# Altium PCB m2t7.PcbDoc (part 3 of 3)
Units mil, origin at the board's own origin, x right, y up, seen from the top; angles counter-clockwise.
Board outline 3925 x 3925 mil, 2 copper layers (TopLayer, BottomLayer); 79 components, 92 nets, 975 pads, 13 vias.
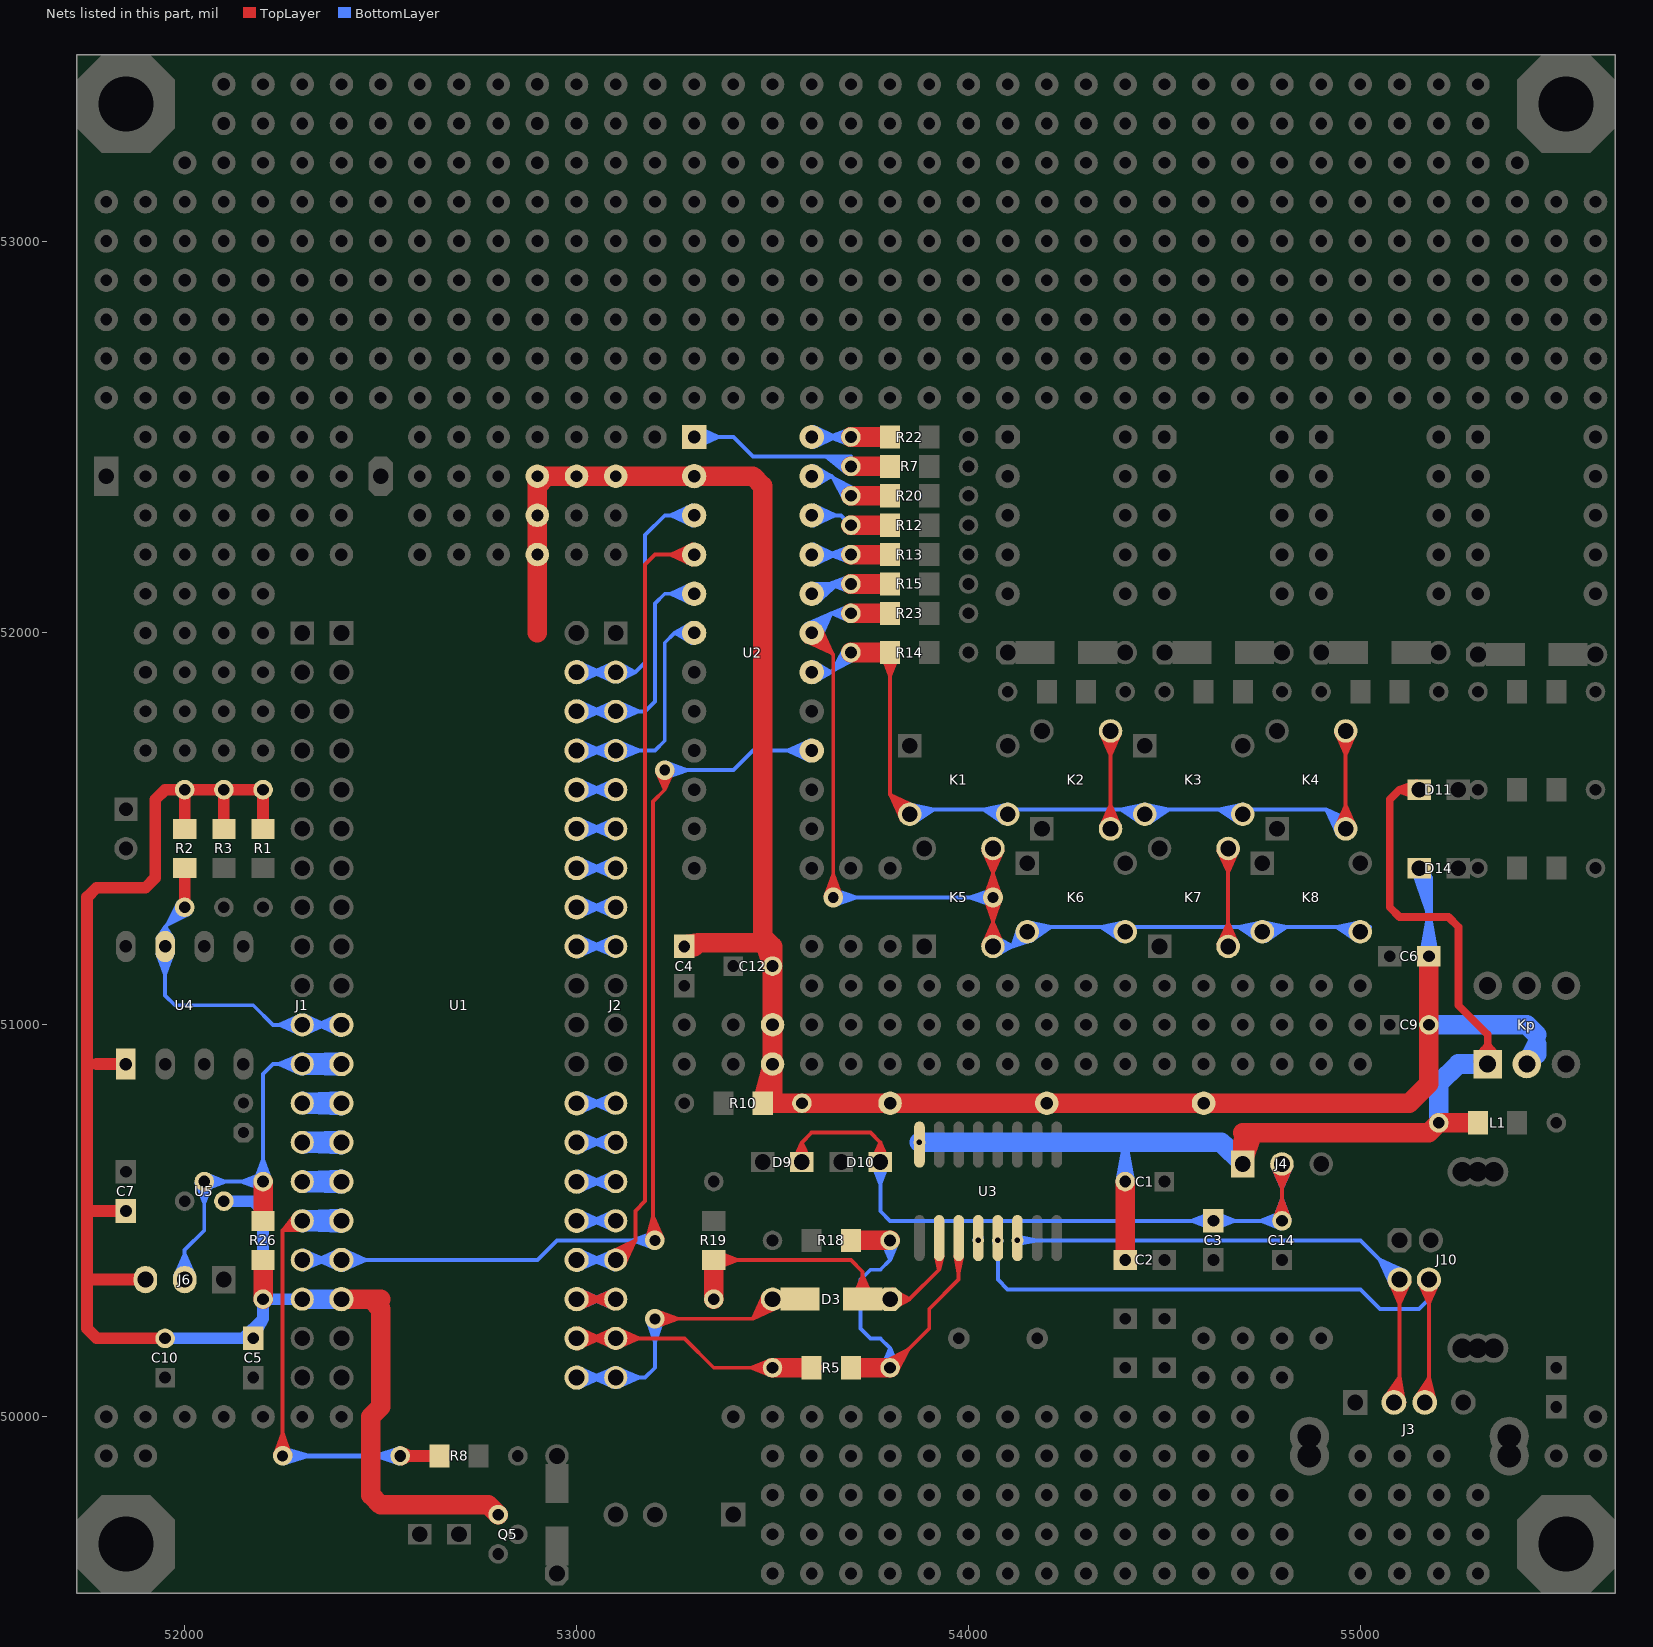
[diagram p3: the nets of this part, all layers, seen from the top]

## Via types
v1: diameter 50, hole 28, TopLayer to BottomLayer, 8 vias
v2: diameter 30, hole 14, TopLayer to BottomLayer, 5 vias

## Nets (pads, with @x,y where several pads share a name; then routed paths per layer and width w, separated by ;. In a path a pad name is that pad's centre, name@x,y a point inside that pad or via, vN(x,y) a via of type N, cw(c..) or ccw(c..) an arc to the next point about the centre after c; other vN are vias at no path point) (continued)
P12: J1.11 R2.2 R2.4 U1.11 U4.7 | length 2380.4
  TopLayer w30: R2.2@52000,51300 R2.4@52000,51400
  BottomLayer w10: U4.7@51930.33,51181.36 51950,51130 ; U4.7@51930.83,51220.71 51950,51250 ; U4.7@51940.04,51184.09 51950,51130 ; U4.7@51940.1,51216.43 51950,51250 ; U4.7@51950,51185 51950,51130 ; U4.7@51950,51215 51950,51250 ; U4.7@51959.9,51216.43 51950,51250 ; U4.7@51959.96,51184.09 51950,51130 ; U4.7@51969.17,51220.71 51950,51250 ; U4.7@51969.67,51181.36 51950,51130 ; R2.2@51983.86,51311.81 51953.79,51253.79 ; R2.2@51992.41,51306.51 51953.79,51253.79 ; R2.2@52000,51300 51950,51250 ; R2.2@52006.51,51292.41 51953.79,51253.79 ; R2.2@52011.81,51283.86 51953.79,51253.79 ; J1.11@52294.95,50976 52240.47,51000 ; J1.11@52294.95,51024 52240.47,51000 ; J1.11@52298.23,50985.58 52240.47,51000 ; J1.11@52298.23,51014.42 52240.47,51000 ; J1.11@52301.77,50985.58 52359.53,51000 ; J1.11@52301.77,51014.42 52359.53,51000 ; J1.11@52305.05,50976 52359.53,51000 ; J1.11@52305.05,51024 52359.53,51000 ; U1.11@52394.46,50974.6 52339,51000 ; U1.11@52394.46,51025.4 52339,51000 ; U1.11@52397.9,50984.14 52339,51000 ; U1.11@52397.9,51015.86 52339,51000 ; U1.11@52399.7,50994.01 52339,51000 ; U1.11@52399.7,51005.99 52339,51000 ; U1.11@52400,51000 J1.11@52300,51000 52225,51000 52175,51050 51975,51050 51950,51075 U4.7@51950,51200 51950,51250
P13: J1.12 J6.2 R26.2 R26.4 U1.12 U5.2 | length 3386.7
  TopLayer w50: R26.4@52200,50500 R26.2@52200,50600
  BottomLayer w10: J6.2@51975.55,50360.21 52000,50415 ; J6.2@51985.12,50356.88 52000,50415 ; J6.2@52000,50350 52000,50425 52050,50475 U5.2@52050,50600 52105,50600 ; J6.2@52000,50355 52000,50415 ; J6.2@52014.88,50356.88 52000,50415 ; J6.2@52024.45,50360.21 52000,50415 ; U5.2@52030.33,50596.36 52050,50545 ; U5.2@52040.04,50599.09 52050,50545 ; U5.2@52050.91,50590.04 52105,50600 ; U5.2@52050.91,50609.96 52105,50600 ; U5.2@52053.64,50580.33 52105,50600 ; U5.2@52053.64,50600 R26.2@52200,50600 52200,50875 52225,50900 J1.12@52300,50900 ; U5.2@52053.64,50619.67 52105,50600 ; U5.2@52059.96,50599.09 52050,50545 ; U5.2@52069.67,50596.36 52050,50545 ; R26.2@52180.33,50603.64 52200,50655 ; R26.2@52190.04,50600.91 52200,50655 ; R26.2@52196.36,50580.33 52145,50600 ; R26.2@52196.36,50619.67 52145,50600 ; R26.2@52199.09,50590.04 52145,50600 ; R26.2@52199.09,50609.96 52145,50600 ; R26.2@52209.96,50600.91 52200,50655 ; R26.2@52219.67,50603.64 52200,50655 ; J1.12@52294.95,50876 52240.47,50900 ; J1.12@52294.95,50924 52240.47,50900 ; J1.12@52298.23,50885.58 52240.47,50900 ; J1.12@52298.23,50914.42 52240.47,50900
  BottomLayer w20: J1.12@52300,50900 U1.12@52400,50900 ; J1.12@52302.13,50880.59 52389.53,50900 J1.12@52302.13,50919.41 ; U1.12@52393.62,50879.99 J1.12@52310.04,50917.65 ; U1.12@52393.62,50920.01 J1.12@52310.04,50882.35 ; U1.12@52397.58,50879.14 52309,50900 U1.12@52397.58,50920.86 ; U1.12@52401.66,50879.07 J1.12@52310.04,50882.35 ; U1.12@52401.66,50920.93 J1.12@52310.04,50917.65 ; J1.12@52310.04,50882.35 U1.12@52400,50900 ; J1.12@52310.04,50917.65 U1.12@52400,50900
P14: J1.13 U1.13 | length 1011.1
  BottomLayer w20: J1.13@52300,50800 U1.13@52400,50800 ; J1.13@52302.13,50780.59 52389.53,50800 J1.13@52302.13,50819.41 ; U1.13@52393.62,50779.99 J1.13@52310.04,50817.65 ; U1.13@52393.62,50820.01 J1.13@52310.04,50782.35 ; U1.13@52397.58,50779.14 52309,50800 U1.13@52397.58,50820.86 ; U1.13@52401.66,50779.07 J1.13@52310.04,50782.35 ; U1.13@52401.66,50820.93 J1.13@52310.04,50817.65 ; J1.13@52310.04,50782.35 U1.13@52400,50800 ; J1.13@52310.04,50817.65 U1.13@52400,50800
P15: J1.14 U1.14 | length 1011.1
  BottomLayer w20: J1.14@52300,50700 U1.14@52400,50700 ; J1.14@52302.13,50680.59 52389.53,50700 J1.14@52302.13,50719.41 ; U1.14@52393.62,50679.99 J1.14@52310.04,50717.65 ; U1.14@52393.62,50720.01 J1.14@52310.04,50682.35 ; U1.14@52397.58,50679.14 52309,50700 U1.14@52397.58,50720.86 ; U1.14@52401.66,50679.07 J1.14@52310.04,50682.35 ; U1.14@52401.66,50720.93 J1.14@52310.04,50717.65 ; J1.14@52310.04,50682.35 U1.14@52400,50700 ; J1.14@52310.04,50717.65 U1.14@52400,50700
P16: J1.15 U1.15 | length 1011.1
  BottomLayer w20: J1.15@52300,50600 U1.15@52400,50600 ; J1.15@52302.13,50580.59 52389.53,50600 J1.15@52302.13,50619.41 ; U1.15@52393.62,50579.99 J1.15@52310.04,50617.65 ; U1.15@52393.62,50620.01 J1.15@52310.04,50582.35 ; U1.15@52397.58,50579.14 52309,50600 U1.15@52397.58,50620.86 ; U1.15@52401.66,50579.07 J1.15@52310.04,50582.35 ; U1.15@52401.66,50620.93 J1.15@52310.04,50617.65 ; J1.15@52310.04,50582.35 U1.15@52400,50600 ; J1.15@52310.04,50617.65 U1.15@52400,50600
P17: J1.16 R8.2 R8.4 U1.16 | length 3350
  TopLayer w10: v1@52230.29,49903.39 52250,49959 ; v1@52240.04,49900.85 52250,49959 ; v1(52250,49900) 52250,49959 ; 52250,49925 52250,50475 ; v1@52259.96,49900.85 52250,49959 ; v1@52269.71,49903.39 52250,49959 ; J1.16@52284.49,50519 52250,50475 ; J1.16@52291.87,50512.04 52250,50475 ; J1.16@52304.75,50486.27 52250,50475 ; J1.16@52305.89,50476.19 52250,50475 ; R8.2@52550,49900 52600,49900 ; R8.2@52551,49890.05 52600,49900 ; R8.2@52551,49909.95 52600,49900 ; R8.2@52554,49880.4 52600,49900 ; R8.2@52554,49919.6 52600,49900 ; 52250,50475 52275,50500 J1.16@52300,50500 52250,50475
  TopLayer w30: R8.2@52550,49900 R8.4@52650,49900
  BottomLayer w12: v1(52250,49900) R8.2@52550,49900 ; v1@52250.38,49893.01 52315,49900 ; v1@52250.38,49906.99 52315,49900 ; v1@52252.78,49881.2 52315,49900 ; v1@52252.78,49918.8 52315,49900 ; R8.2@52547.04,49881.23 52489,49900 ; R8.2@52547.04,49918.77 52489,49900 ; R8.2@52549.6,49893.01 52489,49900 ; R8.2@52549.6,49906.99 52489,49900
  BottomLayer w20: J1.16@52300,50500 U1.16@52400,50500 ; J1.16@52302.13,50480.59 52389.53,50500 J1.16@52302.13,50519.41 ; U1.16@52393.62,50479.99 J1.16@52310.04,50517.65 ; U1.16@52393.62,50520.01 J1.16@52310.04,50482.35 ; U1.16@52397.58,50479.14 52309,50500 U1.16@52397.58,50520.86 ; U1.16@52401.66,50479.07 J1.16@52310.04,50482.35 ; U1.16@52401.66,50520.93 J1.16@52310.04,50517.65 ; J1.16@52310.04,50482.35 U1.16@52400,50500 ; J1.16@52310.04,50517.65 U1.16@52400,50500
P20: J2.9 U1.32 | length 704.1
  BottomLayer w10: U1.32@53000,51200 J2.9@53100,51200 ; U1.32@53000.3,51194.01 53061,51200 ; U1.32@53000.3,51205.99 53061,51200 ; U1.32@53002.1,51184.14 53061,51200 ; U1.32@53002.1,51215.86 53061,51200 ; U1.32@53005.54,51174.6 53061,51200 ; U1.32@53005.54,51225.4 53061,51200 ; J2.9@53094.95,51176 53040.47,51200 ; J2.9@53094.95,51224 53040.47,51200 ; J2.9@53098.23,51185.58 53040.47,51200 ; J2.9@53098.23,51214.42 53040.47,51200
P21: J2.8 U1.33 | length 704.1
  BottomLayer w10: U1.33@53000,51300 J2.8@53100,51300 ; U1.33@53000.3,51294.01 53061,51300 ; U1.33@53000.3,51305.99 53061,51300 ; U1.33@53002.1,51284.14 53061,51300 ; U1.33@53002.1,51315.86 53061,51300 ; U1.33@53005.54,51274.6 53061,51300 ; U1.33@53005.54,51325.4 53061,51300 ; J2.8@53094.95,51276 53040.47,51300 ; J2.8@53094.95,51324 53040.47,51300 ; J2.8@53098.23,51285.58 53040.47,51300 ; J2.8@53098.23,51314.42 53040.47,51300
P22: J2.7 U1.34 | length 704.1
  BottomLayer w10: U1.34@53000,51400 J2.7@53100,51400 ; U1.34@53000.3,51394.01 53061,51400 ; U1.34@53000.3,51405.99 53061,51400 ; U1.34@53002.1,51384.14 53061,51400 ; U1.34@53002.1,51415.86 53061,51400 ; U1.34@53005.54,51374.6 53061,51400 ; U1.34@53005.54,51425.4 53061,51400 ; J2.7@53094.95,51376 53040.47,51400 ; J2.7@53094.95,51424 53040.47,51400 ; J2.7@53098.23,51385.58 53040.47,51400 ; J2.7@53098.23,51414.42 53040.47,51400
P23: J2.6 U1.35 | length 704.1
  BottomLayer w10: U1.35@53000,51500 J2.6@53100,51500 ; U1.35@53000.3,51494.01 53061,51500 ; U1.35@53000.3,51505.99 53061,51500 ; U1.35@53002.1,51484.14 53061,51500 ; U1.35@53002.1,51515.86 53061,51500 ; U1.35@53005.54,51474.6 53061,51500 ; U1.35@53005.54,51525.4 53061,51500 ; J2.6@53094.95,51476 53040.47,51500 ; J2.6@53094.95,51524 53040.47,51500 ; J2.6@53098.23,51485.58 53040.47,51500 ; J2.6@53098.23,51514.42 53040.47,51500
P24: J2.5 U1.36 | length 704.1
  BottomLayer w10: U1.36@53000,51600 J2.5@53100,51600 ; U1.36@53000.3,51594.01 53061,51600 ; U1.36@53000.3,51605.99 53061,51600 ; U1.36@53002.1,51584.14 53061,51600 ; U1.36@53002.1,51615.86 53061,51600 ; U1.36@53005.54,51574.6 53061,51600 ; U1.36@53005.54,51625.4 53061,51600 ; J2.5@53094.95,51576 53040.47,51600 ; J2.5@53094.95,51624 53040.47,51600 ; J2.5@53098.23,51585.58 53040.47,51600 ; J2.5@53098.23,51614.42 53040.47,51600
P25: J2.4 U1.37 U2.6 | length 1712.9
  BottomLayer w10: U1.37@53000,51700 J2.4@53100,51700 53200,51700 53225,51725 53225,51975 53250,52000 ; U1.37@53000.3,51694.01 53061,51700 ; U1.37@53000.3,51705.99 53061,51700 ; U1.37@53002.1,51684.14 53061,51700 ; U1.37@53002.1,51715.86 53061,51700 ; U1.37@53005.54,51674.6 53061,51700 ; U1.37@53005.54,51725.4 53061,51700 ; J2.4@53094.95,51676 53040.47,51700 ; J2.4@53094.95,51724 53040.47,51700 ; J2.4@53098.23,51685.58 53040.47,51700 ; J2.4@53098.23,51714.42 53040.47,51700 ; J2.4@53101.77,51685.58 53159.53,51700 ; J2.4@53101.77,51714.42 53159.53,51700 ; J2.4@53105.05,51676 53159.53,51700 ; J2.4@53105.05,51724 53159.53,51700 ; U2.6@53293.24,51974.89 53250,52000 ; U2.6@53293.24,52025.11 53250,52000 ; U2.6@53297.44,51984.21 53250,52000 ; U2.6@53297.44,52015.79 53250,52000 ; U2.6@53299.64,51994.01 53250,52000 ; U2.6@53299.64,52005.99 53250,52000 ; U2.6@53300,52000 53250,52000
P26: J2.3 U1.38 U2.5 | length 1778.9
  BottomLayer w10: U1.38@53000,51800 J2.3@53100,51800 53175,51800 53200,51825 53200,52075 53225,52100 U2.5@53300,52100 ; U1.38@53000.3,51794.01 53061,51800 ; U1.38@53000.3,51805.99 53061,51800 ; U1.38@53002.1,51784.14 53061,51800 ; U1.38@53002.1,51815.86 53061,51800 ; U1.38@53005.54,51774.6 53061,51800 ; U1.38@53005.54,51825.4 53061,51800 ; J2.3@53094.95,51776 53040.47,51800 ; J2.3@53094.95,51824 53040.47,51800 ; J2.3@53098.23,51785.58 53040.47,51800 ; J2.3@53098.23,51814.42 53040.47,51800 ; J2.3@53101.77,51785.58 53159.53,51800 ; J2.3@53101.77,51814.42 53159.53,51800 ; J2.3@53105.05,51776 53159.53,51800 ; J2.3@53105.05,51824 53159.53,51800 ; U2.5@53294.46,52074.6 53239,52100 ; U2.5@53294.46,52125.4 53239,52100 ; U2.5@53297.9,52084.14 53239,52100 ; U2.5@53297.9,52115.86 53239,52100 ; U2.5@53299.7,52094.01 53239,52100 ; U2.5@53299.7,52105.99 53239,52100
P27: J2.2 U1.39 U2.3 | length 1826.2
  BottomLayer w10: U1.39@53000,51900 J2.2@53100,51900 53150,51900 ; U1.39@53000.3,51894.01 53061,51900 ; U1.39@53000.3,51905.99 53061,51900 ; U1.39@53002.1,51884.14 53061,51900 ; U1.39@53002.1,51915.86 53061,51900 ; U1.39@53005.54,51874.6 53061,51900 ; U1.39@53005.54,51925.4 53061,51900 ; J2.2@53094.95,51876 53040.47,51900 ; J2.2@53094.95,51924 53040.47,51900 ; J2.2@53098.23,51885.58 53040.47,51900 ; J2.2@53098.23,51914.42 53040.47,51900 ; J2.2@53102.11,51885.63 53150,51900 ; J2.2@53102.11,51914.37 53150,51900 ; J2.2@53106.02,51876.22 53150,51900 ; J2.2@53106.02,51923.78 53150,51900 ; U2.3@53294.46,52274.6 53239,52300 ; U2.3@53294.46,52325.4 53239,52300 ; U2.3@53297.9,52284.14 53239,52300 ; U2.3@53297.9,52315.86 53239,52300 ; U2.3@53299.7,52294.01 53239,52300 ; U2.3@53299.7,52305.99 53239,52300 ; U2.3@53300,52300 53225,52300 53175,52250 53175,51925 53150,51900
P32: J2.18 U1.23 | length 1408.2
  TopLayer w10: U1.23@53000,50300 J2.18@53100,50300 ; U1.23@53000.3,50294.01 53061,50300 ; U1.23@53000.3,50305.99 53061,50300 ; U1.23@53002.1,50284.14 53061,50300 ; U1.23@53002.1,50315.86 53061,50300 ; U1.23@53005.54,50274.6 53061,50300 ; U1.23@53005.54,50325.4 53061,50300 ; J2.18@53094.95,50276 53040.47,50300 ; J2.18@53094.95,50324 53040.47,50300 ; J2.18@53098.23,50285.58 53040.47,50300 ; J2.18@53098.23,50314.42 53040.47,50300
  BottomLayer w10: U1.23@53000,50300 J2.18@53100,50300 ; U1.23@53000.3,50294.01 53061,50300 ; U1.23@53000.3,50305.99 53061,50300 ; U1.23@53002.1,50284.14 53061,50300 ; U1.23@53002.1,50315.86 53061,50300 ; U1.23@53005.54,50274.6 53061,50300 ; U1.23@53005.54,50325.4 53061,50300 ; J2.18@53094.95,50276 53040.47,50300 ; J2.18@53094.95,50324 53040.47,50300 ; J2.18@53098.23,50285.58 53040.47,50300 ; J2.18@53098.23,50314.42 53040.47,50300
P33: J2.17 U1.24 U2.4 | length 3294.4
  TopLayer w10: J2.17@53085.93,50420.09 53150,50450 ; J2.17@53090.84,50411.27 53150,50450 ; J2.17@53100,50400 53150,50450 ; J2.17@53111.27,50390.84 53150,50450 ; J2.17@53120.09,50385.93 53150,50450 ; U2.4@53294.46,52174.6 53239,52200 ; U2.4@53294.46,52225.4 53239,52200 ; U2.4@53297.9,52184.14 53239,52200 ; U2.4@53297.9,52215.86 53239,52200 ; U2.4@53299.7,52194.01 53239,52200 ; U2.4@53299.7,52205.99 53239,52200 ; U2.4@53300,52200 53200,52200 53175,52175 53175,50550 53150,50525 53150,50450
  BottomLayer w10: U1.24@53000,50400 J2.17@53100,50400 ; U1.24@53000.3,50394.01 53061,50400 ; U1.24@53000.3,50405.99 53061,50400 ; U1.24@53002.1,50384.14 53061,50400 ; U1.24@53002.1,50415.86 53061,50400 ; U1.24@53005.54,50374.6 53061,50400 ; U1.24@53005.54,50425.4 53061,50400 ; J2.17@53094.95,50376 53040.47,50400 ; J2.17@53094.95,50424 53040.47,50400 ; J2.17@53098.23,50385.58 53040.47,50400 ; J2.17@53098.23,50414.42 53040.47,50400
P34: J2.16 U1.25 | length 704.1
  BottomLayer w10: U1.25@53000,50500 J2.16@53100,50500 ; U1.25@53000.3,50494.01 53061,50500 ; U1.25@53000.3,50505.99 53061,50500 ; U1.25@53002.1,50484.14 53061,50500 ; U1.25@53002.1,50515.86 53061,50500 ; U1.25@53005.54,50474.6 53061,50500 ; U1.25@53005.54,50525.4 53061,50500 ; J2.16@53094.95,50476 53040.47,50500 ; J2.16@53094.95,50524 53040.47,50500 ; J2.16@53098.23,50485.58 53040.47,50500 ; J2.16@53098.23,50514.42 53040.47,50500
P35: J2.15 U1.26 | length 704.1
  BottomLayer w10: U1.26@53000,50600 J2.15@53100,50600 ; U1.26@53000.3,50594.01 53061,50600 ; U1.26@53000.3,50605.99 53061,50600 ; U1.26@53002.1,50584.14 53061,50600 ; U1.26@53002.1,50615.86 53061,50600 ; U1.26@53005.54,50574.6 53061,50600 ; U1.26@53005.54,50625.4 53061,50600 ; J2.15@53094.95,50576 53040.47,50600 ; J2.15@53094.95,50624 53040.47,50600 ; J2.15@53098.23,50585.58 53040.47,50600 ; J2.15@53098.23,50614.42 53040.47,50600
P36: J2.14 U1.27 | length 704.1
  BottomLayer w10: U1.27@53000,50700 J2.14@53100,50700 ; U1.27@53000.3,50694.01 53061,50700 ; U1.27@53000.3,50705.99 53061,50700 ; U1.27@53002.1,50684.14 53061,50700 ; U1.27@53002.1,50715.86 53061,50700 ; U1.27@53005.54,50674.6 53061,50700 ; U1.27@53005.54,50725.4 53061,50700 ; J2.14@53094.95,50676 53040.47,50700 ; J2.14@53094.95,50724 53040.47,50700 ; J2.14@53098.23,50685.58 53040.47,50700 ; J2.14@53098.23,50714.42 53040.47,50700
P37: J2.13 U1.28 | length 704.1
  BottomLayer w10: U1.28@53000,50800 J2.13@53100,50800 ; U1.28@53000.3,50794.01 53061,50800 ; U1.28@53000.3,50805.99 53061,50800 ; U1.28@53002.1,50784.14 53061,50800 ; U1.28@53002.1,50815.86 53061,50800 ; U1.28@53005.54,50774.6 53061,50800 ; U1.28@53005.54,50825.4 53061,50800 ; J2.13@53094.95,50776 53040.47,50800 ; J2.13@53094.95,50824 53040.47,50800 ; J2.13@53098.23,50785.58 53040.47,50800 ; J2.13@53098.23,50814.42 53040.47,50800
P54: J1.17 U1.17 U2.16 | length 4830.5
  TopLayer w10: v1@53180.07,50451.69 53195,50509.49 ; v1@53190,50450 53195,50509.49 ; v1@53195,50455 53195,51570 53225,51600 ; v1(53200,50450) 53195,50509.49 ; v1@53205.4,51646 53225,51600 ; v1@53209.86,50451.67 53195,50509.49 ; v1@53215.05,51649 53225,51600 ; v1@53219.37,50454.99 53195,50509.49 ; v1(53225,51650) 53225,51600 ; v1@53234.95,51649 53225,51600 ; v1@53244.6,51646 53225,51600
  BottomLayer w10: J1.17@52300,50400 U1.17@52400,50400 52900,50400 52950,50450 v1(53200,50450) ; J1.17@52301.77,50385.58 52359.53,50400 ; J1.17@52301.77,50414.42 52359.53,50400 ; J1.17@52305.05,50376 52359.53,50400 ; J1.17@52305.05,50424 52359.53,50400 ; U1.17@52394.46,50374.6 52339,50400 ; U1.17@52394.46,50425.4 52339,50400 ; U1.17@52397.9,50384.14 52339,50400 ; U1.17@52397.9,50415.86 52339,50400 ; U1.17@52399.7,50394.01 52339,50400 ; U1.17@52399.7,50405.99 52339,50400 ; U1.17@52400.3,50394.01 52461,50400 ; U1.17@52400.3,50405.99 52461,50400 ; U1.17@52402.1,50384.14 52461,50400 ; U1.17@52402.1,50415.86 52461,50400 ; U1.17@52405.54,50374.6 52461,50400 ; U1.17@52405.54,50425.4 52461,50400 ; v1@53196.61,50430.29 53141,50450 ; v1@53196.61,50469.71 53141,50450 ; v1@53199.15,50440.04 53141,50450 ; v1@53199.15,50459.96 53141,50450 ; v1(53225,51650) 53400,51650 53450,51700 U2.16@53600,51700 ; v1@53225.85,51640.04 53284,51650 ; v1@53225.85,51659.96 53284,51650 ; v1@53228.39,51630.29 53284,51650 ; v1@53228.39,51669.71 53284,51650 ; U2.16@53594.46,51674.6 53539,51700 ; U2.16@53594.46,51725.4 53539,51700 ; U2.16@53597.9,51684.14 53539,51700 ; U2.16@53597.9,51715.86 53539,51700 ; U2.16@53599.7,51694.01 53539,51700 ; U2.16@53599.7,51705.99 53539,51700
RX: D3.1 D3.3 R19.1 R19.3 U3.2 | length 1622.1
  TopLayer w10: R19.3@53350,50400 53700,50400 53730,50370 D3.3@53730,50300 ; R19.3@53353.94,50400 53409.53,50400 ; R19.3@53354.95,50389.46 53409.53,50400 ; R19.3@53354.95,50410.54 53409.53,50400 ; R19.3@53357.75,50379.77 53409.53,50400 ; R19.3@53357.75,50420.23 53409.53,50400 ; D3.3@53706,50305.05 53730,50359.53 ; D3.3@53715.58,50301.77 53730,50359.53 ; D3.3@53744.42,50301.77 53730,50359.53 ; D3.3@53754,50305.05 53730,50359.53 ; D3.1@53800,50300 53850,50300 ; D3.1@53802.25,50285.17 53850,50300 ; D3.1@53802.25,50314.83 53850,50300 ; D3.1@53806.25,50275.79 53850,50300 ; D3.1@53806.25,50324.21 53850,50300 ; U3.2@53916.56,50409.48 53925,50375 ; U3.2@53925,50410.5 53925,50375 ; U3.2@53925,50456 53925,50375 ; U3.2@53933.44,50409.48 53925,50375 ; 53850,50300 53925,50375
  TopLayer w50: R19.1@53350,50300 R19.3@53350,50400
RXD: D3.2 D3.4 J2.20 U1.21 | length 2253.1
  TopLayer w10: v1(53200,50250) 53450,50250 ; v1@53200.85,50240.04 53259,50250 ; v1@53200.85,50259.96 53259,50250 ; v1@53203.39,50230.29 53259,50250 ; v1@53203.39,50269.71 53259,50250 ; D3.2@53479.48,50314.27 53450,50250 ; D3.2@53488.33,50309.42 53450,50250 ; D3.2@53500,50300 53450,50250 ; D3.2@53509.42,50288.33 53450,50250 ; D3.2@53514.27,50279.48 53450,50250
  BottomLayer w10: U1.21@53000,50100 J2.20@53100,50100 53175,50100 53200,50125 v1(53200,50250) ; U1.21@53000.3,50094.01 53061,50100 ; U1.21@53000.3,50105.99 53061,50100 ; U1.21@53002.1,50084.14 53061,50100 ; U1.21@53002.1,50115.86 53061,50100 ; U1.21@53005.54,50074.6 53061,50100 ; U1.21@53005.54,50125.4 53061,50100 ; J2.20@53094.95,50076 53040.47,50100 ; J2.20@53094.95,50124 53040.47,50100 ; J2.20@53098.23,50085.58 53040.47,50100 ; J2.20@53098.23,50114.42 53040.47,50100 ; J2.20@53101.77,50085.58 53159.53,50100 ; J2.20@53101.77,50114.42 53159.53,50100 ; J2.20@53105.05,50076 53159.53,50100 ; J2.20@53105.05,50124 53159.53,50100 ; v1@53180.29,50246.61 53200,50191 ; v1@53190.04,50249.15 53200,50191 ; v1@53209.96,50249.15 53200,50191 ; v1@53219.71,50246.61 53200,50191
SEG0: K1.2 K1.3 K2.2 K2.3 K3.2 K3.3 K4.2 K4.3 R14.1 R14.3 U2.18 | length 6658.4
  TopLayer w10: R14.3@53775,51950 53800,51925 53800,51587.5 ; R14.3@53779.77,51942.25 53800,51890.47 ; R14.3@53789.46,51945.05 53800,51890.47 ; R14.3@53800,51946.06 53800,51890.47 ; R14.3@53810.54,51945.05 53800,51890.47 ; R14.3@53820.23,51942.25 53800,51890.47 ; K1.2@53829.48,51523.23 53800,51587.5 ; K1.2@53838.33,51528.08 53800,51587.5 ; K1.2@53850,51537.5 53800,51587.5 ; K1.2@53859.42,51549.17 53800,51587.5 ; K1.2@53864.27,51558.02 53800,51587.5 ; K2.2@54338.05,51505.21 54362.5,51560 ; K2.3@54338.05,51744.79 54362.5,51690 ; K2.2@54347.62,51501.88 54362.5,51560 ; K2.3@54347.62,51748.12 54362.5,51690 ; K2.2@54362.5,51500 K2.3@54362.5,51750 ; K2.2@54377.38,51501.88 54362.5,51560 ; K2.3@54377.38,51748.12 54362.5,51690 ; K2.2@54386.95,51505.21 54362.5,51560 ; K2.3@54386.95,51744.79 54362.5,51690 ; K4.2@54938.05,51505.21 54962.5,51560 ; K4.3@54938.05,51744.79 54962.5,51690 ; K4.2@54947.62,51501.88 54962.5,51560 ; K4.3@54947.62,51748.12 54962.5,51690 ; K4.2@54962.5,51500 K4.3@54962.5,51750 ; K4.2@54977.38,51501.88 54962.5,51560 ; K4.3@54977.38,51748.12 54962.5,51690 ; K4.2@54986.95,51505.21 54962.5,51560 ; K4.3@54986.95,51744.79 54962.5,51690
  TopLayer w50: R14.1@53700,51950 53775,51950 R14.3@53800,51950 R14.1@53700,51950
  BottomLayer w10: U2.18@53600,51900 53650,51900 ; U2.18@53600.36,51894.01 53650,51900 ; U2.18@53600.36,51905.99 53650,51900 ; U2.18@53602.56,51884.21 53650,51900 ; U2.18@53602.56,51915.79 53650,51900 ; U2.18@53606.76,51874.89 53650,51900 ; U2.18@53606.76,51925.11 53650,51900 ; R14.1@53683.86,51961.81 53653.79,51903.79 ; R14.1@53692.41,51956.51 53653.79,51903.79 ; R14.1@53706.51,51942.41 53653.79,51903.79 ; R14.1@53711.81,51933.86 53653.79,51903.79 ; K1.2@53848.8,51552.45 53912.19,51550 ; K1.2@53850,51537.5 53912.19,51550 ; K1.2@53850,51550 54300,51550 54700,51550 54900,51550 54912.5,51550 ; K1.2@53850,51562.5 53912.19,51550 ; K1.2@53854.67,51523.25 53912.19,51550 ; K1.2@53859.66,51514.44 53912.19,51550 ; K1.3@54090.31,51514.46 54038.05,51550 ; K1.3@54095.31,51523.25 54038.05,51550 ; K1.3@54100,51537.5 54038.05,51550 ; K1.3@54100,51562.5 54038.05,51550 ; K1.3@54101.2,51552.45 54038.05,51550 ; K2.2@54338.29,51506.25 54362.5,51550 ; K2.2@54347.67,51502.25 54362.5,51550 ; K2.2@54362.5,51500 54362.5,51550 ; K2.2@54377.33,51502.25 54362.5,51550 ; K2.2@54386.71,51506.25 54362.5,51550 ; K3.2@54440.26,51514.48 54388.38,51550 ; K3.2@54445.29,51523.26 54388.38,51550 ; K3.2@54448.8,51552.45 54511.95,51550 ; K3.2@54451.21,51552.45 54388.38,51550 ; K3.2@54454.69,51523.25 54511.95,51550 ; K3.2@54459.69,51514.46 54511.95,51550 ; K3.3@54690.33,51514.44 54637.85,51550 ; K3.3@54695.32,51523.25 54637.85,51550 ; K3.3@54700,51537.5 54637.85,51550 ; K3.3@54700,51562.5 54637.85,51550 ; K3.3@54701.2,51552.45 54637.85,51550 ; K4.2@54941.98,51485.73 54912.5,51550 ; K4.2@54950.83,51490.58 54912.5,51550 ; K4.2@54962.5,51500 54912.5,51550 ; K4.2@54971.92,51511.67 54912.5,51550 ; K4.2@54976.77,51520.52 54912.5,51550 ; 53650,51900 R14.1@53700,51950 53653.79,51903.79 ; 54388.38,51550 54450,51562.5 54511.95,51550 ; 54388.38,51550 K3.2@54450,51537.5 54511.95,51550
SEG1: K5.2 K5.3 K6.2 K6.3 K7.2 K7.3 K8.2 K8.3 R23.1 R23.3 U2.19 | length 8325.9
  TopLayer w10: U2.19@53585.14,51978.67 53652.21,51947.79 ; U2.19@53589.98,51987.53 53652.21,51947.79 ; U2.19@53595.93,51995.59 53652.21,51947.79 ; U2.19@53600,52000 53655,51945 v1(53655,51325) ; U2.19@53604.41,52004.07 53652.21,51947.79 ; U2.19@53612.47,52010.02 53652.21,51947.79 ; U2.19@53621.33,52014.86 53652.21,51947.79 ; v1@53635.29,51328.39 53655,51384 ; v1@53645.04,51325.85 53655,51384 ; v1@53664.96,51325.85 53655,51384 ; v1@53674.71,51328.39 53655,51384 ; K5.2@54038.05,51205.21 54062.5,51260 ; K5.3@54038.05,51444.79 54062.5,51390 ; v1@54042.79,51321.61 54062.5,51266 ; v1@54042.79,51328.39 54062.5,51384 ; K5.2@54047.62,51201.88 54062.5,51260 ; K5.3@54047.62,51448.12 54062.5,51390 ; v1@54052.54,51324.15 54062.5,51266 ; v1@54052.54,51325.85 54062.5,51384 ; K5.2@54062.5,51200 v1(54062.5,51325) K5.3@54062.5,51450 ; v1@54072.46,51324.15 54062.5,51266 ; v1@54072.46,51325.85 54062.5,51384 ; K5.2@54077.38,51201.88 54062.5,51260 ; K5.3@54077.38,51448.12 54062.5,51390 ; v1@54082.21,51321.61 54062.5,51266 ; v1@54082.21,51328.39 54062.5,51384 ; K5.2@54086.95,51205.21 54062.5,51260 ; K5.3@54086.95,51444.79 54062.5,51390 ; K7.2@54638.05,51205.21 54662.5,51260 ; K7.3@54638.05,51444.79 54662.5,51390 ; K7.2@54647.62,51201.88 54662.5,51260 ; K7.3@54647.62,51448.12 54662.5,51390 ; K7.2@54662.5,51200 K7.3@54662.5,51450 ; K7.2@54677.38,51201.88 54662.5,51260 ; K7.3@54677.38,51448.12 54662.5,51390 ; K7.2@54686.95,51205.21 54662.5,51260 ; K7.3@54686.95,51444.79 54662.5,51390
  TopLayer w50: R23.1@53700,52050 R23.3@53800,52050
  BottomLayer w10: U2.19@53585.31,52021.45 53650,52050 ; U2.19@53590.04,52012.52 53650,52050 ; U2.19@53595.94,52004.42 53650,52050 ; U2.19@53600,52000 53650,52050 ; U2.19@53604.42,51995.94 53650,52050 ; U2.19@53612.52,51990.04 53650,52050 ; U2.19@53621.45,51985.31 53650,52050 ; v1(53655,51325) v1(54062.5,51325) ; v1@53655.85,51315.04 53714,51325 ; v1@53655.85,51334.96 53714,51325 ; v1@53658.39,51305.29 53714,51325 ; v1@53658.39,51344.71 53714,51325 ; R23.1@53696,52030.4 53650,52050 ; R23.1@53696,52069.6 53650,52050 ; R23.1@53699,52040.05 53650,52050 ; R23.1@53699,52059.95 53650,52050 ; v1@54059.11,51305.29 54003.5,51325 ; v1@54059.11,51344.71 54003.5,51325 ; v1@54061.65,51315.04 54003.5,51325 ; v1@54061.65,51334.96 54003.5,51325 ; K5.2@54062.5,51212.5 K5.2@54062.5,51200 54112.5,51200 ; K5.2@54064.75,51185.17 54112.5,51200 ; K5.2@54064.75,51214.83 54112.5,51200 ; K5.2@54068.75,51175.79 54112.5,51200 ; K5.2@54068.75,51224.21 54112.5,51200 ; K6.2@54128.65,51250.51 54112.5,51200 ; K6.2@54137.5,51250 K6.2@54150,51237.5 ; K6.2@54138,51246.5 54112.5,51200 ; K6.2@54148.8,51252.45 54211.95,51250 ; K6.2@54150,51250 54400,51250 54650,51250 54662.5,51250 ; K6.2@54150,51262.5 54211.95,51250 ; K6.2@54154.69,51223.25 54211.95,51250 ; K6.2@54159,51225.5 54112.5,51200 ; K6.2@54159.69,51214.46 54211.95,51250 ; K6.2@54163.01,51216.15 54112.5,51200 ; K6.3@54390.31,51214.46 54338.05,51250 ; K6.3@54395.31,51223.25 54338.05,51250 ; K6.3@54400,51237.5 54338.05,51250 ; K6.3@54400,51262.5 54338.05,51250 ; K6.3@54401.2,51252.45 54338.05,51250 ; K7.2@54638.29,51206.25 54662.5,51250 ; K7.2@54647.67,51202.25 54662.5,51250 ; K7.2@54662.5,51200 54662.5,51250 ; K7.2@54677.33,51202.25 54662.5,51250 ; K7.2@54686.71,51206.25 54662.5,51250 ; K8.2@54740.18,51214.51 54688.9,51250 ; K8.2@54745.25,51223.27 54688.9,51250 ; K8.2@54748.8,51252.45 54812,51250 ; K8.2@54751.22,51252.45 54688.9,51250 ; K8.2@54754.69,51223.25 54812,51250 ; K8.2@54759.69,51214.45 54812,51250 ; K8.3@54990.19,51214.5 54938.83,51250 ; K8.3@54995.25,51223.27 54938.83,51250 ; K8.3@55000,51237.5 54938.83,51250 ; K8.3@55000,51262.5 54938.83,51250 ; K8.3@55001.22,51252.45 54938.83,51250 ; K8.3@55025,51250 54662.5,51250 ; 53650,52050 R23.1@53700,52050 53650,52050 ; 54112.5,51200 K6.2@54150,51237.5 ; K6.2@54150,51237.5 54211.95,51250 ; 54688.9,51250 54750,51262.5 54812,51250 ; 54688.9,51250 K8.2@54750,51237.5 54812,51250
SEG2: R15.1 R15.3 U2.20 | length 946
  TopLayer w50: R15.1@53700,52125 R15.3@53800,52125
  BottomLayer w10: U2.20@53595.39,52125.59 53665.48,52125 ; U2.20@53596.04,52115.5 53665.48,52125 ; U2.20@53598.1,52105.69 53665.48,52125 ; U2.20@53600,52125 R15.1@53700,52125 ; U2.20@53602.38,52094.49 53665.48,52125 ; U2.20@53607.38,52085.8 53665.48,52125 ; U2.20@53613.62,52077.85 53665.48,52125 ; 53625,52125 U2.20@53600,52100 53665.48,52125 ; R15.1@53696.36,52105.33 53645,52125 ; R15.1@53696.36,52144.67 53645,52125 ; R15.1@53699.09,52115.04 53645,52125 ; R15.1@53699.09,52134.96 53645,52125
SEG3: R13.1 R13.3 U2.21 | length 786
  TopLayer w50: R13.1@53700,52200 R13.3@53800,52200
  BottomLayer w10: U2.21@53600,52200 R13.1@53700,52200 ; U2.21@53600.3,52194.01 53661,52200 ; U2.21@53600.3,52205.99 53661,52200 ; U2.21@53602.1,52184.14 53661,52200 ; U2.21@53602.1,52215.86 53661,52200 ; U2.21@53605.54,52174.6 53661,52200 ; U2.21@53605.54,52225.4 53661,52200 ; R13.1@53696.36,52180.33 53645,52200 ; R13.1@53696.36,52219.67 53645,52200 ; R13.1@53699.09,52190.04 53645,52200 ; R13.1@53699.09,52209.96 53645,52200
SEG4: R12.1 R12.3 U2.22 | length 576.4
  TopLayer w50: R12.1@53700,52275 R12.3@53800,52275
  BottomLayer w10: U2.22@53600,52300 53675,52300 R12.1@53700,52275 ; U2.22@53600.3,52294.01 53661,52300 ; U2.22@53600.3,52305.99 53661,52300 ; U2.22@53602.1,52284.14 53661,52300 ; U2.22@53602.1,52315.86 53661,52300 ; U2.22@53605.54,52274.6 53661,52300 ; U2.22@53605.54,52325.4 53661,52300
SEG5: R20.1 R20.3 U2.23 | length 847.5
  TopLayer w50: R20.1@53700,52350 R20.3@53800,52350
  BottomLayer w10: U2.23@53600,52400 53650,52400 ; U2.23@53600.36,52394.01 53650,52400 ; U2.23@53600.36,52405.99 53650,52400 ; U2.23@53602.56,52384.21 53650,52400 ; U2.23@53602.56,52415.79 53650,52400 ; U2.23@53606.76,52374.89 53650,52400 ; U2.23@53606.76,52425.11 53650,52400 ; R20.1@53683.86,52338.19 53653.79,52396.21 ; R20.1@53692.41,52343.49 53653.79,52396.21 ; R20.1@53706.51,52357.59 53653.79,52396.21 ; R20.1@53711.81,52366.14 53653.79,52396.21 ; 53650,52400 R20.1@53700,52350 53653.79,52396.21
SEG6: R22.1 R22.3 U2.24 | length 786
  TopLayer w50: R22.1@53700,52500 R22.3@53800,52500
  BottomLayer w10: U2.24@53600,52500 R22.1@53700,52500 ; U2.24@53600.3,52494.01 53661,52500 ; U2.24@53600.3,52505.99 53661,52500 ; U2.24@53602.1,52484.14 53661,52500 ; U2.24@53602.1,52515.86 53661,52500 ; U2.24@53605.54,52474.6 53661,52500 ; U2.24@53605.54,52525.4 53661,52500 ; R22.1@53696.36,52480.33 53645,52500 ; R22.1@53696.36,52519.67 53645,52500 ; R22.1@53699.09,52490.04 53645,52500 ; R22.1@53699.09,52509.96 53645,52500
SEG7: R7.1 R7.3 U2.1 | length 1228.6
  TopLayer w50: R7.1@53700,52425 R7.3@53800,52425
  BottomLayer w10: U2.1@53300,52500 53400,52500 53450,52450 53700,52450 ; U2.1@53300.3,52494.01 53361,52500 ; U2.1@53300.3,52505.99 53361,52500 ; U2.1@53302.1,52484.14 53361,52500 ; U2.1@53302.1,52515.86 53361,52500 ; U2.1@53305.54,52474.6 53361,52500 ; U2.1@53305.54,52525.4 53361,52500 ; R7.1@53690.04,52407.65 53636.37,52450 ; R7.1@53695.67,52415.98 53636.37,52450 ; R7.1@53700,52425 53636.37,52450 ; R7.1@53702.97,52434.55 53636.37,52450 ; R7.1@53704.51,52444.48 53636.37,52450
TX: R5.1 R5.3 R18.1 R18.3 U3.3 | length 1811.8
  TopLayer w10: R5.1@53788.19,50141.14 53846.21,50171.21 ; R5.1@53793.49,50132.59 53846.21,50171.21 ; R5.1@53800,50125 53900,50225 53900,50275 53975,50350 U3.3@53975,50456 ; R5.1@53807.59,50118.49 53846.21,50171.21 ; R5.1@53816.14,50113.19 53846.21,50171.21 ; U3.3@53966.54,50409.67 53975,50367 ; U3.3@53975,50410.5 53975,50367 ; U3.3@53983.46,50409.67 53975,50367
  TopLayer w50: R5.3@53700,50125 R5.1@53800,50125 ; R18.3@53700,50450 R18.1@53800,50450
  BottomLayer w10: R5.1@53780.4,50129 53800,50175 ; R18.1@53780.4,50446 53800,50400 ; R5.1@53790.05,50126 53800,50175 ; R18.1@53790.05,50449 53800,50400 ; R5.1@53800,50125 53800,50175 ; R18.1@53800,50450 53800,50400 ; R5.1@53809.95,50126 53800,50175 ; R18.1@53809.95,50449 53800,50400 ; R5.1@53819.6,50129 53800,50175 ; R18.1@53819.6,50446 53800,50400 ; 53800,50175 53775,50200 53750,50200 53725,50225 53725,50350 53750,50375 53775,50375 53800,50400
TXD: J2.19 R5.2 R5.4 U1.22 | length 1693.3
  TopLayer w10: U1.22@53000,50200 J2.19@53100,50200 53275,50200 53350,50125 R5.2@53500,50125 ; U1.22@53000.3,50194.01 53061,50200 ; U1.22@53000.3,50205.99 53061,50200 ; U1.22@53002.1,50184.14 53061,50200 ; U1.22@53002.1,50215.86 53061,50200 ; U1.22@53005.54,50174.6 53061,50200 ; U1.22@53005.54,50225.4 53061,50200 ; J2.19@53094.95,50176 53040.47,50200 ; J2.19@53094.95,50224 53040.47,50200 ; J2.19@53098.23,50185.58 53040.47,50200 ; J2.19@53098.23,50214.42 53040.47,50200 ; J2.19@53101.77,50185.58 53159.53,50200 ; J2.19@53101.77,50214.42 53159.53,50200 ; J2.19@53105.05,50176 53159.53,50200 ; J2.19@53105.05,50224 53159.53,50200 ; R5.2@53496.36,50105.33 53445,50125 ; R5.2@53496.36,50144.67 53445,50125 ; R5.2@53499.09,50115.04 53445,50125 ; R5.2@53499.09,50134.96 53445,50125
  TopLayer w50: R5.2@53500,50125 R5.4@53600,50125
UD+: J3.3 J10.3 U3.5 | length 2824.7
  TopLayer w10: J3.3@55139.69,50046.06 55175,50100 ; J3.3@55148.58,50041.2 55175,50100 ; J10.3@55149.6,50344.46 55175,50289 ; J3.3@55158.03,50037.81 55175,50100 ; J10.3@55159.14,50347.9 55175,50289 ; J10.3@55169.01,50349.7 55175,50289 ; J3.3@55170.82,50035.67 55175,50100 ; J10.3@55175,50350 55175,50047.05 J3.3@55164.37,50036.42 55175,50100 ; J3.3@55180.85,50035.8 55175,50100 ; J10.3@55180.99,50349.7 55175,50289 ; J3.3@55190.84,50037.51 55175,50100 ; J10.3@55190.86,50347.9 55175,50289 ; J10.3@55200.4,50344.46 55175,50289
  BottomLayer w10: v2@54065.05,50448.98 54075,50401 v2@54084.95,50448.98 ; v2(54075,50450) 54075,50350 54100,50325 55000,50325 55050,50275 55150,50275 55175,50300 ; J10.3@55149.89,50343.24 55175,50300 ; J10.3@55159.21,50347.44 55175,50300 ; J10.3@55169.01,50349.64 55175,50300 ; J10.3@55175,50350 55175,50300 ; J10.3@55180.99,50349.64 55175,50300 ; J10.3@55190.79,50347.44 55175,50300 ; J10.3@55200.11,50343.24 55175,50300
UD-: J3.2 J10.2 U3.6 | length 2789.9
  TopLayer w10: J3.2@55061.36,50047.05 55100,50102.24 ; J3.2@55070.07,50041.88 55100,50102.24 ; J10.2@55074.6,50344.46 55100,50289 ; J3.2@55079.36,50038.11 55100,50102.24 ; J10.2@55084.14,50347.9 55100,50289 ; J3.2@55092.04,50035.34 55100,50102.24 ; J10.2@55094.01,50349.7 55100,50289 ; J10.2@55100,50350 55100,50050.79 J3.2@55085.63,50036.42 55100,50102.24 ; J3.2@55102.06,50034.9 55100,50102.24 ; J10.2@55105.99,50349.7 55100,50289 ; J3.2@55112.12,50035.97 55100,50102.24 ; J10.2@55115.86,50347.9 55100,50289 ; J10.2@55125.4,50344.46 55100,50289
  BottomLayer w10: v2(54125,50450) 55000,50450 J10.2@55100,50350 55047.79,50402.21 ; v2@54125,50456 v2@54126,50455 ; v2@54126.02,50440.05 54174,50450 v2@54126.02,50459.95 ; J10.2@55078.67,50335.14 55047.79,50402.21 ; J10.2@55087.53,50339.98 55047.79,50402.21 ; J10.2@55095.59,50345.93 55047.79,50402.21 ; J10.2@55104.07,50354.41 55047.79,50402.21 ; J10.2@55110.02,50362.47 55047.79,50402.21 ; J10.2@55114.86,50371.33 55047.79,50402.21
V33: C3.1 C14.2 D9.1 D10.1 J4.2 U3.4 | length 4356.4
  TopLayer w10: D9.1@53554.47,50654.41 53575,50700 ; D9.1@53564.07,50651.21 53575,50700 ; D9.1@53575,50650 53575,50700 ; D9.1@53585.93,50651.21 53575,50700 ; D9.1@53595.53,50654.41 53575,50700 ; D10.1@53754.47,50654.41 53775,50700 ; D10.1@53764.07,50651.21 53775,50700 ; D10.1@53775,50650 53775,50700 ; D10.1@53785.93,50651.21 53775,50700 ; D10.1@53795.53,50654.41 53775,50700 ; J4.2@54775.55,50639.79 54800,50585 ; C14.2@54780.33,50503.64 54800,50555 ; J4.2@54785.12,50643.12 54800,50585 ; C14.2@54790.04,50500.91 54800,50555 ; C14.2@54800,50500 54800,50555 ; 54800,50525 J4.2@54800,50650 ; J4.2@54800,50645 54800,50585 ; C14.2@54809.96,50500.91 54800,50555 ; J4.2@54814.88,50643.12 54800,50585 ; C14.2@54819.67,50503.64 54800,50555 ; J4.2@54824.45,50639.79 54800,50585 ; 53575,50700 53600,50725 53750,50725 53775,50700
  BottomLayer w10: D10.1@53754.37,50646.06 53775,50594 ; D10.1@53764.05,50648.92 53775,50594 ; D10.1@53775,50650 53775,50525 53800,50500 54025,50500 ; D10.1@53785.95,50648.92 53775,50594 ; D10.1@53795.63,50646.06 53775,50594 ; v2@54015.05,50451.02 54025,50499 v2@54034.95,50451.02 ; v2(54025,50450) 54025,50500 ; C3.1@54621.06,50479.37 54569,50500 ; C3.1@54621.06,50520.63 54569,50500 ; C3.1@54623.92,50489.05 54569,50500 ; C3.1@54623.92,50510.95 54569,50500 ; C3.1@54626.08,50489.05 54681,50500 ; C3.1@54626.08,50510.95 54681,50500 ; C3.1@54628.94,50479.37 54681,50500 ; C3.1@54628.94,50520.63 54681,50500 ; C14.2@54775,50500 54800,50525 J4.2@54800,50650 ; J4.2@54775.55,50639.79 54800,50585 ; C14.2@54780.33,50503.64 54800,50555 ; J4.2@54785.12,50643.12 54800,50585 ; C14.2@54790.04,50500.91 54800,50555 ; C14.2@54796.36,50480.33 54745,50500 ; C14.2@54796.36,50519.67 54745,50500 ; C14.2@54799.09,50490.04 54745,50500 ; C14.2@54799.09,50509.96 54745,50500 ; J4.2@54800,50645 54800,50585 ; C14.2@54809.96,50500.91 54800,50555 ; J4.2@54814.88,50643.12 54800,50585 ; C14.2@54819.67,50503.64 54800,50555 ; J4.2@54824.45,50639.79 54800,50585 ; 54025,50500 C3.1@54625,50500 C14.2@54800,50500 54800,50555
VCC: C4.1 C5.1 C6.1 C7.1 C9.2 C10.2 C12.2 D14.1 J1.18 J6.3 Kp.2 pad.0@54200,50800 pad.1@52900,52400 pad.2@53000,52400 pad.3@53100,52400 pad.4@52900,52300 pad.5@52900,52200 pad.31@54600,50800 pad.32@53800,50800 pad.46 pad.47 Q5.1 R1.1 R1.3 R2.1 R2.3 R3.1 R3.3 R10.1 R10.3 R26.1 R26.3 U1.18 U2.2 U4.1 U5.3 | length 11602.7
  TopLayer w30: 51751,50350 J6.3@51900,50350 ; 51751,50575 51751,50525 ; 51775,50200 51776,50200 ; 51775,50900 U4.1@51850,50900 ; C10.2@51950,50200 51776,50200 ; R2.3@52000,51500 R2.1@52000,51600 ; R3.3@52100,51500 R3.1@52100,51600 ; R1.3@52200,51500 R1.1@52200,51600 R3.1@52100,51600 ; R10.3@53475,50800 R10.3@53500,50800 ; 51751,50525 C7.1@51850,50525 51751,50525 ; 51776,50200 51751,50225 51751,50500 51751,51326 51775,51350 51900,51350 51925,51375 51925,51575 51950,51600 R2.1@52000,51600 ; R2.1@52000,51600 R3.1@52100,51600
  TopLayer w50: R26.1@52200,50300 R26.3@52200,50400 ; U1.18@52400,50300 52475,50300 ; 52500,50300 52475,50300 ; Q5.1@52800,49750 52775,49775 52500,49775 52475,49800 52475,50000 52500,50025 52500,50275 52475,50300 ; 52900,52000 52900,52375 52925,52400 U2.2@53300,52400 53450,52400 53475,52375 53475,51225 ; pad.5@52900,52220 pad.1@52900,52400 pad.3@53080,52400 ; C4.1@53300,51200 53310,51210 ; 53460,51210 53310,51210 ; R10.3@53475,50800 53650.59,50800 ; R10.3@53475,50803.94 pad.47@53500,50900 ; R10.3@53500,50800 pad.32@53800,50800 pad.0@54200,50800 pad.31@54600,50800 55125,50800 55175,50850 C9.2@55175,51000 C6.1@55175,51175 ; R10.3@53500,50825 pad.47@53500,50900 ; 53310,51210 53275,51204 53310,51210 ; 53475,51225 53500,51200 ; 53475,51225 C12.2@53500,51150 ; pad.47@53500,50900 pad.46@53500,51000 C12.2@53500,51150 ; C12.2@53500,51150 53500,51200 ; C12.2@53500,51150 53500,51200
  BottomLayer w20: D14.1@55138.57,51395.78 55175,51292.87 ; D14.1@55154,51400 55175,51292.87 ; C6.1@55159.07,51176.49 55175,51261 C6.1@55190.93,51176.49 ; D14.1@55169.88,51401.92 55175,51292.87 ; C6.1@55175,51175 D14.1@55175,51375 ; D14.1@55175,51375 D14.1@55150,51400 D14.1@55175,51375
  BottomLayer w30: C10.2@51950,50200 52150,50200 52200,50250 ; 52059,50200 C5.1@52175,50200 ; U5.3@52100,50550 52175,50550 52200,50525 52200,50250 ; C5.1@52175,50204 52200,50250 ; R26.1@52200,50300 J1.18@52300,50300
  BottomLayer w50: J1.18@52300,50300 U1.18@52400,50300 ; C9.2@55175,51000 55424.76,51000 ; C9.2@55175.5,50999.54 C9.2@55175.5,51000.5 ; Kp.2@55424.76,50900 55450,50950 Kp.2@55450,50925 ; 55424.76,51000 55450,50975 55424.76,51000
VCCU: C1.2 C2.1 D11.1 J4.1 Kp.1 L1.2 L1.4 U3.16 | length 3862.6
  TopLayer w20: D11.1@55143.22,51584.24 55100,51600 ; D11.1@55143.22,51615.76 55100,51600 ; D11.1@55146,51600 55100,51600 ; D11.1@55150,51600 55100,51600 ; Kp.1@55299.31,50907.09 55325,50950.04 ; Kp.1@55324.76,50900 55325,50950.04 ; Kp.1@55325,50900 55325,50950.04 ; Kp.1@55350.27,50906.85 55325,50950.04 ; 55100,51600 55075,51575 55075,51300 55100,51275 55225,51275 55250,51250 55250,51050 55325,50975 55325,50950.04
  TopLayer w50: C2.1@54400,50400 C1.2@54400,50600 ; 54700,50725 54725,50725 ; Kp.1@55325,50900 Kp.1@55325,50925 ; J4.1@54700,50650 54700,50700 ; J4.1@54700,50650 54700,50700 ; J4.1@54700,50650 54725,50725 ; J4.1@54700,50650 54700,50700 ; 54700,50700 54725,50725 ; 54725,50725 55175,50725 L1.2@55200,50750 ; L1.2@55200,50750 L1.4@55300,50750 L1.2@55200,50750
  BottomLayer w20: C1.2@54385.06,50601.32 54400,50685 C1.2@54414.94,50601.32 ; C1.2@54400,50600 54400,50700
  BottomLayer w50: v2(53875,50700) 54400,50700 54645,50700 ; J4.1@54700,50645 54645,50700 ; J4.1@54700,50650 54645,50700 ; L1.2@55200,50750 55200,50850 55250,50900 Kp.1@55324.76,50900
pads on no net: J3.5 J3.6 J10.5 J10.6 Kp.3 Kp.4 Kp.5 Kp.6 U2.17 U3.9 U3.10 U3.11 U3.12 U3.13 U3.14 U3.15

## Polygon pours and split planes (outlines as drawn)
VCC on TopLayer "VCC" (solid, pour order 1000): 52475,50000 52925,50000 52925,52050 52475,52050

## Keep-outs
KeepOutLayer:
  the board outline again, w2

## Other copper
TopLayer:
  text "m2t7" at 55425,51725 h60
  text "oooooooooo" at 51950,49750 h50
  text "1234567890" at 51975,49650 h50
  text "oooooooooo" at 51975,49575 h50

## Silkscreen, mask and mechanical layers (free items; w line width, h text height)
TopOverlay:
  text "m2t7" at 55425,51725 h60
  text "USB-P" at 55325,51650 h30
  text "SCM-P" at 55325,51450 h30
  text "scm-rxd" at 53625,50825 h40
  text "5V 3.3V GND" at 54650,50750 h30
  text "scm-txd" at 53400,50500 h40
  text "2017-03-15" at 52000,49800 h40